# EAGLE board outin_shield_arduino (EAGLE 7.4.0)
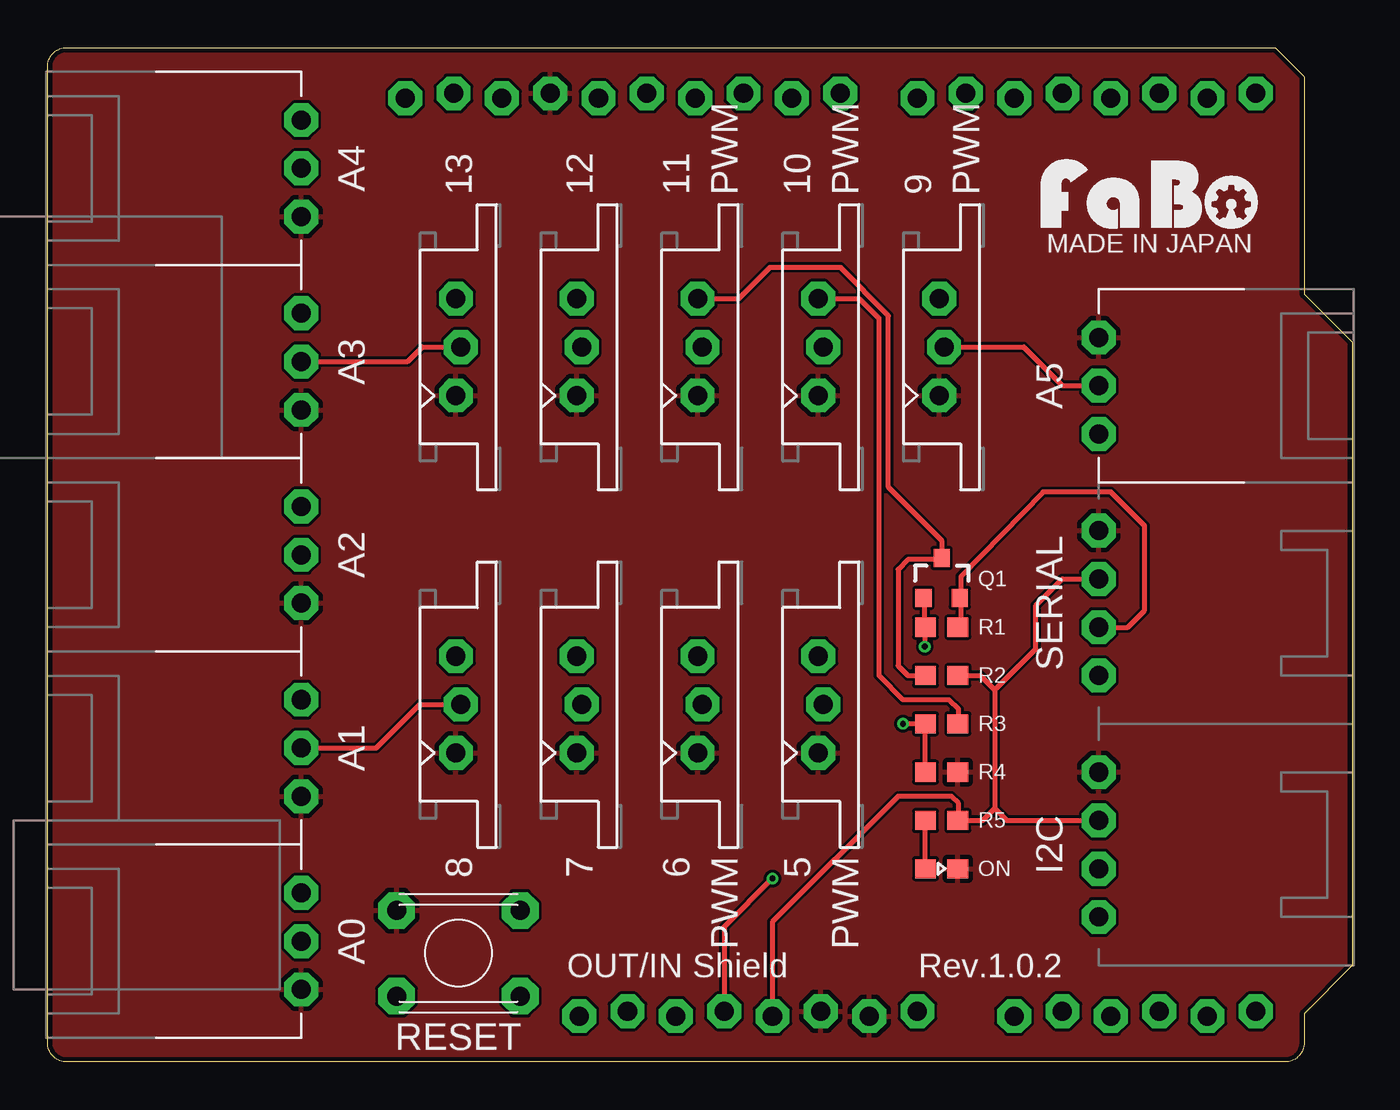
[diagram p0: board, top side]
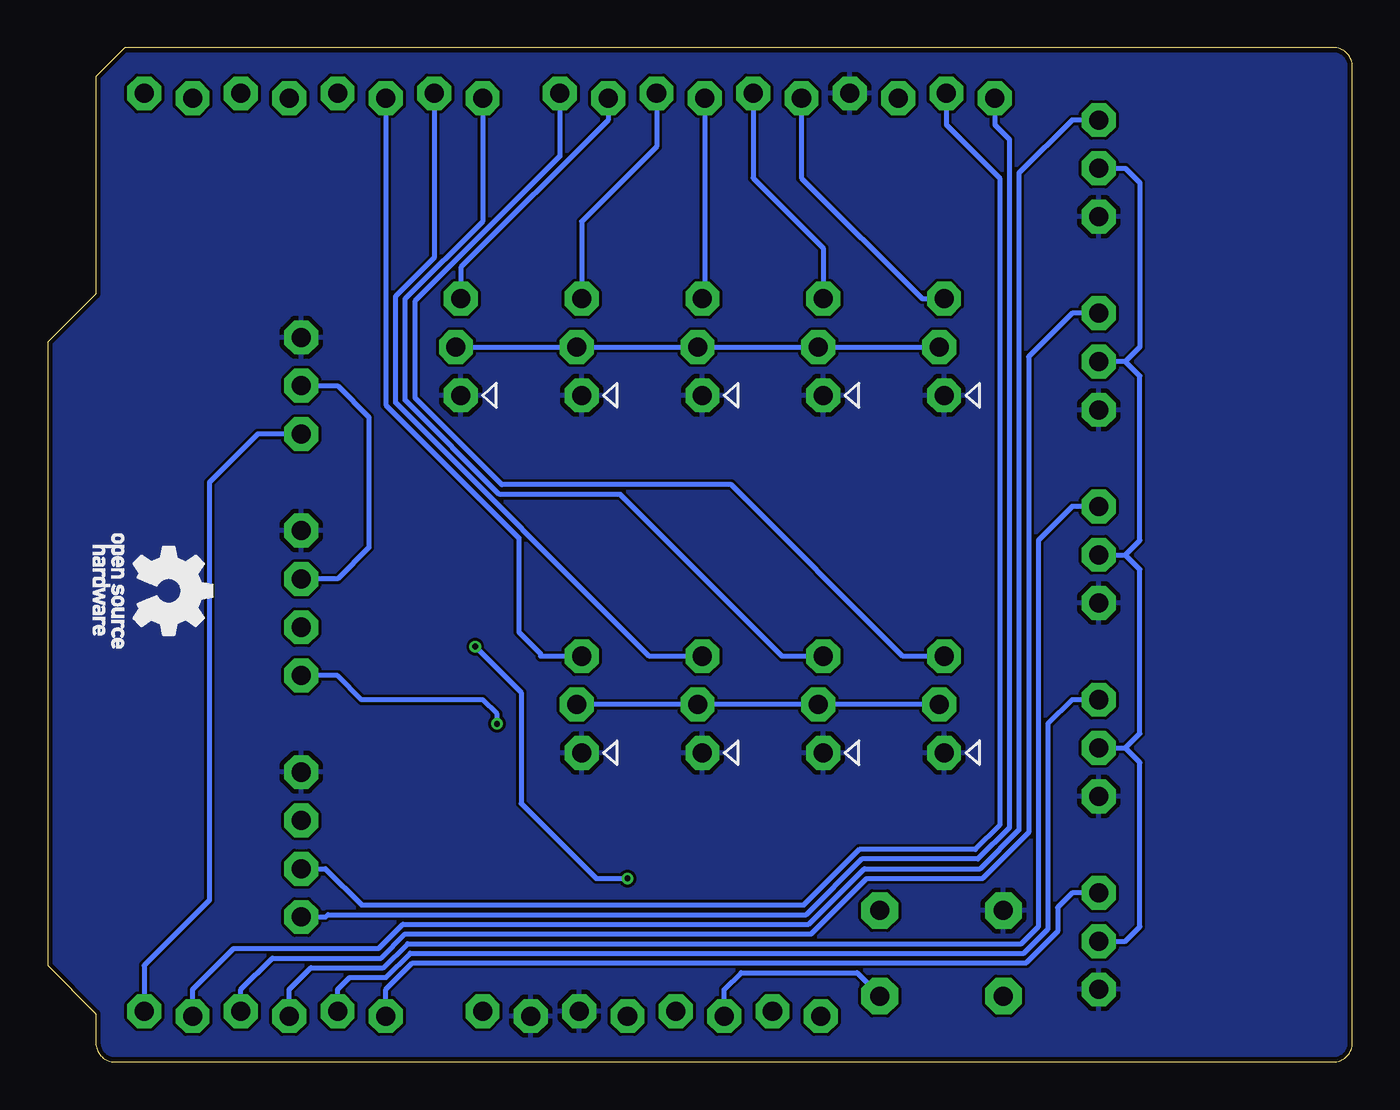
[diagram p1: board, bottom side, seen from below]

Size 68.58 x 53.34 mm. Coordinates in mm from the lower left corner, seen from the top.
Copper layers (1*16): Top 0.035mm / dielectric 1.5mm / Bottom 0.035mm
Design rules "Elecrow_2-layer_eagle_rule": minimum track width 6mil, minimum drill 12mil, track to track 6mil, track to pad 6mil, pad to pad 6mil, via to via 6mil, smd to smd 0mil, copper to edge 10mil, drill to drill 10mil, minimum pad ring 10mil, minimum via ring 6mil, stop-mask expansion 2mil, vias tented up to drill 100mil, thermal gap 10mil

## Footprints (pad centres in the part's own frame; a part is rotated, then mirrored left to right if it is on the bottom)
FABO_BRICK_3PIN_CONNECTOR = drill 1 pad 1.778 octagon: GND -2.54,0; IN/OUT 2.54,0; VCC 0,0
FABO_BRICK_3PIN_HEADER = drill 1 pad 1.778 octagon: GND -2.54,0.127; I/O 2.54,0.127; VCC 0,-0.127
FABO_BRICK_I2C_CONNECTOR = drill 1 pad 1.778 octagon: GND -3.81,0; SCL 3.81,0; SDA 1.27,0; VCC -1.27,0
EIA0603-LED = smd 1.1 x 1: A -0.85,0; C 0.85,0
SOT23-3 = smd 0.85 x 0.95: 1 -0.95,-1; 2 0.95,-1; 3 0,1.1
EIA0603 = smd 1.1 x 1: 1 -0.85,0; 2 0.85,0
FABO_BRICK_SERIAL_CONNECTOR = drill 1 pad 1.778 octagon: GND -3.81,0; RX 3.81,0; TX 1.27,0; VCC -1.27,0
DTS_6_V = drill 1 pad 1.93 octagon: 1 -3.25,2.25; 2 3.25,2.25; 3 -3.25,-2.25; 4 3.25,-2.25
ARDUINO_UNO_R3_NOLABEL = drill 1 pad 1.778 octagon: 3V3 35.56,2.667; 5V 38.1,2.413; A0 50.8,2.413; A1 53.34,2.667; A2 55.88,2.413; A3 58.42,2.667; A4 60.96,2.413; A5 63.5,2.667; AREF 23.876,50.673; D0 63.5,50.927; D1 60.96,50.673; D2 58.42,50.927; D3 55.88,50.673; D4 53.34,50.927; D5 50.8,50.673; D6 48.26,50.927; D7 45.72,50.673; D8 41.656,50.927; D9 39.116,50.673; D10 36.576,50.927; D11 34.036,50.673; D12 31.496,50.927; D13 28.956,50.673; GND1 43.18,2.413; GND2 40.64,2.667; GND3 26.416,50.927; IOREF 30.48,2.667; RESERVED 27.94,2.413; RESET 33.02,2.413; SCL 18.796,50.673; SDA 21.336,50.927; VIN 45.72,2.667

## Placement (x,y rotation side)
A0  [FABO_BRICK_3PIN_CONNECTOR]  13.34,6.35 90 top
A1  [FABO_BRICK_3PIN_CONNECTOR]  13.34,16.51 90 top
A2  [FABO_BRICK_3PIN_CONNECTOR]  13.34,26.67 90 top
A3  [FABO_BRICK_3PIN_CONNECTOR]  13.34,36.83 90 top
A4  [FABO_BRICK_3PIN_CONNECTOR]  13.34,46.99 90 top
A5  [FABO_BRICK_3PIN_CONNECTOR]  55.24,35.56 270 top
D5  [FABO_BRICK_3PIN_HEADER]  40.64,18.8 90 top
D6  [FABO_BRICK_3PIN_HEADER]  34.29,18.8 90 top
D7  [FABO_BRICK_3PIN_HEADER]  27.94,18.8 90 top
D8  [FABO_BRICK_3PIN_HEADER]  21.59,18.8 90 top
D9  [FABO_BRICK_3PIN_HEADER]  46.99,37.59 90 top
D10  [FABO_BRICK_3PIN_HEADER]  40.64,37.59 90 top
D11  [FABO_BRICK_3PIN_HEADER]  34.29,37.59 90 top
D12  [FABO_BRICK_3PIN_HEADER]  27.94,37.59 90 top
D13  [FABO_BRICK_3PIN_HEADER]  21.59,37.59 90 top
I2C  [FABO_BRICK_I2C_CONNECTOR]  55.24,11.43 270 top
ON  [EIA0603-LED]  46.99,10.16 0 top
Q1  [SOT23-3]  46.99,25.4 0 top
R1  10k  [EIA0603]  46.99,22.86 180 top
R2  10k  [EIA0603]  46.99,20.32 0 top
R3  3k  [EIA0603]  46.99,17.78 0 top
R4  4.7k  [EIA0603]  46.99,15.24 180 top
R5  1k  [EIA0603]  46.99,12.7 0 top
SERIAL  [FABO_BRICK_SERIAL_CONNECTOR]  55.24,24.13 270 top
SW1  RESET  [DTS_6_V]  21.59,5.71 0 top
U1  [ARDUINO_UNO_R3_NOLABEL]  0,0 0 top
U$21  [LOGO_FABO_M]  57.91,43.81 0 top
U$22  [LOGO_OSHW_T_M_BOTTOM]  62.23,24.77 90 top

## Library data of the parts
A0 A1-A5 D5-D13 I2C SERIAL = FaBo-Template
ON Q1 R1-R5 SW1 U$21 U$22 = FaBo-etc
U1 = FaBo-Boards

## Nets
3V3: Q1.1 R1.2 U1.3V3
5V: A0.VCC A1.VCC A2.VCC A3.VCC A4.VCC A5.VCC D5.VCC D6.VCC D7.VCC D8.VCC D9.VCC D10.VCC D11.VCC D12.VCC D13.VCC I2C.VCC R2.2 R5.2 SERIAL.VCC U1.5V
A0: A0.IN/OUT U1.A0
A1: A1.IN/OUT U1.A1
A2: A2.IN/OUT U1.A2
A3: A3.IN/OUT U1.A3
A4: A4.IN/OUT U1.A4
A5: A5.IN/OUT U1.A5
D2: U1.D2
D3: U1.D3
D4: U1.D4
D5: D5.I/O U1.D5
D6: D6.I/O U1.D6
D7: D7.I/O U1.D7
D8: D8.I/O U1.D8
D9: D9.I/O U1.D9
D10: D10.I/O R3.2 U1.D10
D11: D11.I/O Q1.3 R2.1 U1.D11
D12: D12.I/O U1.D12
D13: D13.I/O U1.D13
GND: A0.GND A1.GND A2.GND A3.GND A4.GND A5.GND D5.GND D6.GND D7.GND D8.GND D9.GND D10.GND D11.GND D12.GND D13.GND I2C.GND ON.C R4.1 SERIAL.GND SW1.1 U1.GND1 U1.GND2 U1.GND3
LEDANO: ON.A R5.1
RESET: SW1.4 U1.RESET
RX: R3.1 R4.2 SERIAL.RX
SCL: I2C.SCL U1.SCL
SDA: I2C.SDA U1.SDA
TX: Q1.2 R1.1 SERIAL.TX
VIN: U1.VIN

## Tracks (layer width: path | path; a pad name or v marks a point on that pad's centre or on a via)
3V3  (via drill 0.3)
  Top 0.254: Q1.1 46.1,24.34 46.1,23.24 46.14,23.2 R1.2 46.14,22.52 46.1,22.48 v46.1,21.84 | v38.1,9.65 35.56,7.11 U1.3V3
  Bottom 0.254: v46.1,21.84 43.69,19.43 43.69,13.59 39.75,9.65 v38.1,9.65
5V
  Top 0.254: R2.2 49.02,20.32 49.78,19.56 | 49.78,19.56 49.78,13.34 | 49.78,13.34 49.15,12.7 R5.2 47.88,12.74 47.88,13.59 47.5,13.97 44.7,13.97 38.1,7.37 U1.5V | 49.78,13.34 50.42,12.7 I2C.VCC | 49.78,19.56 51.94,21.72 51.94,24 53.34,25.4 SERIAL.VCC | A1.VCC 17.27,16.51 19.56,18.8 D8.VCC | A3.VCC 18.92,36.83 19.68,37.59 D13.VCC | D9.VCC 51.31,37.59 53.34,35.56 A5.VCC
  Bottom 0.254: A4.VCC 11.94,46.99 11.18,46.23 11.18,37.59 11.94,36.83 | 11.94,36.83 A3.VCC | A2.VCC 11.94,26.67 | 11.94,26.67 11.18,27.43 11.18,36.07 11.94,36.83 | A1.VCC 11.94,16.51 | 11.94,16.51 11.18,17.27 11.18,25.91 11.94,26.67 | A0.VCC 11.94,6.35 11.18,7.11 11.18,15.75 11.94,16.51 | D8.VCC D7.VCC D6.VCC D5.VCC | D9.VCC D10.VCC D11.VCC D12.VCC D13.VCC | A5.VCC 53.34,35.56 51.69,33.91 51.69,27.05 53.34,25.4 SERIAL.VCC
A0
  Bottom 0.254: U1.A0 50.8,3.81 49.4,5.21 17.14,5.21 15.49,6.86 15.49,8.13 14.73,8.89 A0.IN/OUT
A1
  Bottom 0.254: U1.A1 53.34,3.81 52.7,4.45 50.8,4.45 49.53,5.71 17.27,5.71 16,6.99 16,17.78 14.73,19.05 A1.IN/OUT
A2
  Bottom 0.254: U1.A2 55.88,3.81 54.74,4.95 50.93,4.95 49.66,6.22 17.4,6.22 16.51,7.11 16.51,27.43 14.73,29.21 A2.IN/OUT
A3
  Bottom 0.254: U1.A3 58.42,3.81 56.77,5.46 51.05,5.46 49.78,6.73 28.45,6.73 25.53,9.65 19.43,9.65 17.02,12.06 17.02,37.08 14.73,39.37 A3.IN/OUT
A4
  Bottom 0.254: U1.A4 60.96,3.81 58.8,5.97 51.18,5.97 49.91,7.24 28.57,7.24 25.65,10.16 19.56,10.16 17.53,12.19 17.53,46.74 14.73,49.53 A4.IN/OUT
A5
  Bottom 0.254: A5.IN/OUT 57.53,33.02 60.07,30.48 60.07,8.51 63.5,5.08 U1.A5
D5
  Bottom 0.254: U1.D5 50.8,34.54 43.81,27.56 43.81,22.61 42.67,21.46 42.67,21.34 D5.I/O
D6
  Bottom 0.254: U1.D6 48.26,42.29 50.29,40.26 50.29,34.67 36.96,21.34 D6.I/O
D7
  Bottom 0.254: U1.D7 45.72,44.2 49.78,40.13 49.78,34.8 44.83,29.84 38.48,29.84 29.97,21.34 D7.I/O
D8
  Bottom 0.254: U1.D8 41.66,47.62 49.28,40.01 49.28,34.92 44.7,30.35 32.64,30.35 23.62,21.34 D8.I/O
D9
  Bottom 0.254: U1.D9 39.12,49.53 46.86,41.78 D9.I/O
D10
  Top 0.254: R3.2 47.88,17.82 47.88,18.54 47.37,19.05 44.96,19.05 43.69,20.32 43.69,39.12 42.67,40.13 D10.I/O
  Bottom 0.254: U1.D10 36.58,48.13 40.51,44.2 D10.I/O
D11
  Top 0.254: Q1.3 46.74,26.54 46.86,26.54 | D11.I/O 36.32,40.13 37.97,41.78 41.66,41.78 44.2,39.24 44.2,30.23 46.99,27.43 Q1.3 | Q1.3 46.95,26.5 46.86,26.54 | R2.1 45.21,20.32 44.7,20.83 44.7,25.91 45.21,26.42 46.99,26.42 46.86,26.54
  Bottom 0.254: U1.D11 34.04,40.26 D11.I/O
D12
  Bottom 0.254: U1.D12 31.5,46.48 27.81,42.8 D12.I/O
D13
  Bottom 0.254: U1.D13 28.96,46.48 22.61,40.13 D13.I/O
GND
  pour Bottom: -1.27,-1.27 69.85,-1.27 69.85,54.61 -1.27,54.61
  pour Top: -1.27,-1.27 69.85,-1.27 69.85,54.61 -1.27,54.61
LEDANO
  Top 0.254: R5.1 46.1,12.66 46.1,10.2 ON.A
RESET
  Bottom 0.254: U1.RESET 33.02,3.81 32.13,4.7 26.04,4.7 24.89,3.56 SW1.4
RX  (via drill 0.3)
  Top 0.254: R4.2 46.1,15.24 46.14,15.28 R3.1 v44.96,17.78
  Bottom 0.254: v44.96,17.78 44.96,18.29 45.72,19.05 52.07,19.05 53.34,20.32 SERIAL.RX
SCL
  Bottom 0.254: I2C.SCL 53.98,7.62 53.85,7.75 28.7,7.75 25.78,10.67 19.68,10.67 18.03,12.32 18.03,48.51 18.8,49.28 U1.SCL
SDA
  Bottom 0.254: I2C.SDA 53.98,10.16 52.07,8.26 28.83,8.26 25.91,11.18 19.81,11.18 18.54,12.45 18.54,46.48 21.34,49.28 U1.SDA
TX
  Top 0.254: SERIAL.TX 56.77,22.86 57.66,23.75 57.66,28.19 55.88,29.97 52.32,29.97 48.01,25.53 48.01,24.47 Q1.2 47.94,24.2 48.01,24.13 48.01,23.03 R1.1

## Text on the board
tPlace: 13 | 12 | 11 | PWM | 10 | PWM | 9 | PWM | MADE IN JAPAN | 8 | 7 | 6 | PWM | 5 | PWM | OUT/IN Shield | Rev.1.0.2 | RESET